# EAGLE board SO28 (EAGLE 6.4)
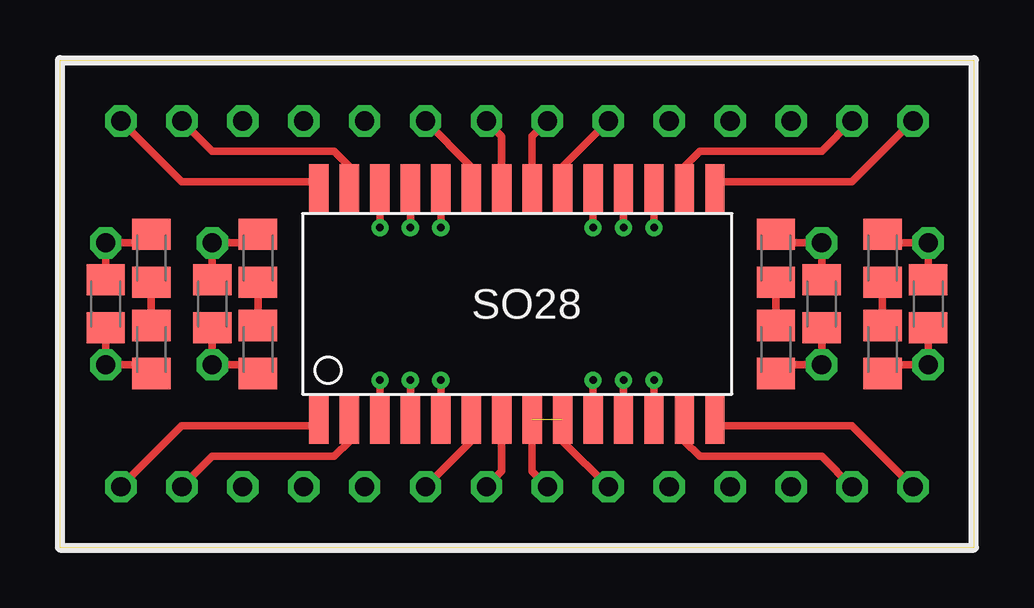
[diagram p0: board, top side]
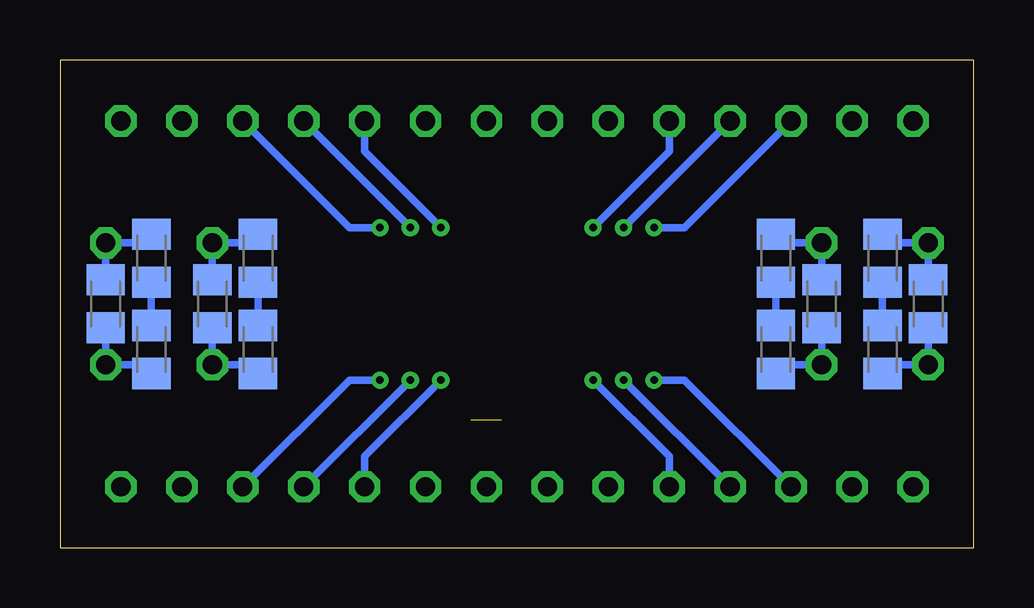
[diagram p1: board, bottom side, seen from below]

Size 38.1 x 20.32 mm. Coordinates in mm from the lower left corner, seen from the top.
Outline: 38.1,20.32 38.1,0 0,0 0,20.32 38.1,20.32
Copper layers (1*16): Top 0.035mm / dielectric 1.5mm / Bottom 0.035mm
Design rules "default": minimum track width 10mil, minimum drill 0.6mm, track to track 8mil, track to pad 8mil, pad to pad 8mil, via to via 8mil, smd to smd 8mil, copper to edge 40mil, drill to drill 8mil, minimum pad ring 10mil, minimum via ring 8mil, stop-mask expansion 4mil, vias tented up to drill 0mil, thermal gap 10mil
Net classes: 1 pwr: width 0.254 mm

## Footprints (pad centres in the part's own frame; a part is rotated, then mirrored left to right if it is on the bottom)
1 = drill 0.8 octagon: P$1 0,0
SO-28L = smd 0.8 x 2: 1 -8.255,-4.826; 2 -6.985,-4.826; 3 -5.715,-4.826; 4 -4.445,-4.826; 5 -3.175,-4.826; 6 -1.905,-4.826; 7 -0.635,-4.826; 8 0.635,-4.826; 9 1.905,-4.826; 10 3.175,-4.826; 11 4.445,-4.826; 12 5.715,-4.826; 13 6.985,-4.826; 14 8.255,-4.826; 15 8.255,4.826; 16 6.985,4.826; 17 5.715,4.826; 18 4.445,4.826; 19 3.175,4.826; 20 1.905,4.826; 21 0.635,4.826; 22 -0.635,4.826; 23 -1.905,4.826; 24 -3.175,4.826; 25 -4.445,4.826; 26 -5.715,4.826; 27 -6.985,4.826; 28 -8.255,4.826
C0805K = smd 1.3 x 1.6: 1 -1,0; 2 1,0

## Placement (x,y rotation side)
E$55  [1]  17.78,2.54 90 top
E$56  [1]  15.24,2.54 90 top
E$57  [1]  12.7,2.54 90 top
E$64  [SO-28L]  19.05,10.16 0 top
E$94  [1]  10.16,2.54 90 top
E$96  [1]  7.62,2.54 90 top
E$97  [1]  5.08,2.54 90 top
E$98  [1]  2.54,2.54 90 top
E$99  [C0805K]  6.35,10.16 90 top
E$100  [1]  6.35,12.7 0 top
E$101  [1]  6.35,7.62 0 top
E$102  [C0805K]  8.26,12.06 90 top
E$103  [1]  35.56,2.54 90 top
E$104  [1]  33.02,2.54 90 top
E$105  [1]  30.48,2.54 90 top
E$106  [1]  27.94,2.54 90 top
E$107  [1]  25.4,2.54 90 top
E$108  [1]  22.86,2.54 90 top
E$109  [1]  20.32,2.54 90 top
E$110  [1]  17.78,17.78 90 top
E$111  [1]  15.24,17.78 90 top
E$112  [1]  12.7,17.78 90 top
E$113  [1]  10.16,17.78 90 top
E$114  [1]  7.62,17.78 90 top
E$115  [1]  5.08,17.78 90 top
E$116  [1]  2.54,17.78 90 top
E$117  [C0805K]  8.26,8.26 90 top
E$118  [C0805K]  8.26,12.06 90 bottom
E$119  [C0805K]  8.26,8.26 90 bottom
E$120  [C0805K]  6.35,10.16 90 bottom
E$121  [1]  35.56,17.78 90 top
E$122  [1]  33.02,17.78 90 top
E$123  [1]  30.48,17.78 90 top
E$124  [1]  27.94,17.78 90 top
E$125  [1]  25.4,17.78 90 top
E$126  [1]  22.86,17.78 90 top
E$127  [1]  20.32,17.78 90 top
E$136  [C0805K]  1.91,10.16 90 top
E$137  [1]  1.91,12.7 0 top
E$138  [1]  1.91,7.62 0 top
E$139  [C0805K]  3.81,12.06 90 top
E$140  [C0805K]  3.81,8.26 90 top
E$141  [C0805K]  3.81,12.06 90 bottom
E$142  [C0805K]  3.81,8.26 90 bottom
E$143  [C0805K]  1.91,10.16 90 bottom
E$144  [C0805K]  31.75,10.16 270 top
E$145  [1]  31.75,7.62 180 top
E$146  [1]  31.75,12.7 180 top
E$147  [C0805K]  29.84,8.26 270 top
E$148  [C0805K]  29.84,12.06 270 top
E$149  [C0805K]  29.84,8.26 270 bottom
E$150  [C0805K]  29.84,12.06 270 bottom
E$151  [C0805K]  31.75,10.16 270 bottom
E$152  [C0805K]  36.2,10.16 270 top
E$153  [1]  36.2,7.62 180 top
E$154  [1]  36.2,12.7 180 top
E$155  [C0805K]  34.29,8.26 270 top
E$156  [C0805K]  34.29,12.06 270 top
E$157  [C0805K]  34.29,8.26 270 bottom
E$158  [C0805K]  34.29,12.06 270 bottom
E$159  [C0805K]  36.2,10.16 270 bottom

## Library data of the parts
E$55-E$57 E$94 E$96-E$98 E$100 E$101 E$103-E$116 E$121-E$127 E$137 E$138 E$145 E$146 E$153 E$154 = drill
E$64 E$99 E$102 E$117-E$120 E$136 E$139-E$144 E$147-E$152 E$155-E$159 = ref-packages

## Nets
S$56 [pwr]: E$64.8 E$64.9 E$108.P$1 E$109.P$1
S$57 [pwr]: E$64.10 E$107.P$1
S$58 [pwr]: E$64.11 E$106.P$1
S$59 [pwr]: E$64.12 E$105.P$1
S$60 [pwr]: E$64.13 E$104.P$1
S$61 [pwr]: E$64.14 E$103.P$1
S$62 [pwr]: E$55.P$1 E$64.7
S$63 [pwr]: E$56.P$1 E$64.6
S$64 [pwr]: E$57.P$1 E$64.5
S$65 [pwr]: E$64.4 E$94.P$1
S$66 [pwr]: E$64.3 E$96.P$1
S$67 [pwr]: E$64.2 E$97.P$1
S$68 [pwr]: E$64.1 E$98.P$1
S$69 [pwr]: E$64.28 E$116.P$1
S$70 [pwr]: E$64.27 E$115.P$1
S$71 [pwr]: E$64.26 E$114.P$1
S$72 [pwr]: E$64.25 E$113.P$1
S$73 [pwr]: E$64.24 E$112.P$1
S$74 [pwr]: E$64.23 E$111.P$1
S$75 [pwr]: E$64.22 E$110.P$1
S$76 [pwr]: E$64.21 E$127.P$1
S$77 [pwr]: E$64.20 E$126.P$1
S$78 [pwr]: E$64.19 E$125.P$1
S$79 [pwr]: E$64.18 E$124.P$1
S$80 [pwr]: E$64.17 E$123.P$1
S$81 [pwr]: E$64.16 E$122.P$1
S$82 [pwr]: E$64.15 E$121.P$1
S$88: E$99.1 E$101.P$1 E$117.1 E$119.1 E$120.1
S$89: E$102.1 E$117.2
S$90: E$99.2 E$100.P$1 E$102.2 E$118.2 E$120.2
S$91: E$118.1 E$119.2
S$92: E$136.1 E$138.P$1 E$140.1 E$142.1 E$143.1
S$93: E$139.1 E$140.2
S$94: E$136.2 E$137.P$1 E$139.2 E$141.2 E$143.2
S$95: E$141.1 E$142.2
S$96: E$144.1 E$146.P$1 E$148.1 E$150.1 E$151.1
S$97: E$147.1 E$148.2
S$98: E$144.2 E$145.P$1 E$147.2 E$149.2 E$151.2
S$99: E$149.1 E$150.2
S$100: E$152.1 E$154.P$1 E$156.1 E$158.1 E$159.1
S$101: E$155.1 E$156.2
S$102: E$152.2 E$153.P$1 E$155.2 E$157.2 E$159.2
S$103: E$157.1 E$158.2

## Tracks (layer width: path | path; a pad name or v marks a point on that pad's centre or on a via)
S$56  (1 unrouted)
  Top 0.305: E$64.8 19.68,3.17 E$109.P$1 | E$64.9 20.95,4.45 E$108.P$1
S$57  (via drill 0.3)
  Top 0.305: E$64.10 v22.23,6.99
  Bottom 0.305: v22.23,6.99 25.4,3.81 E$107.P$1
S$58  (via drill 0.3)
  Top 0.305: E$64.11 v23.5,6.99
  Bottom 0.305: v23.5,6.99 E$106.P$1
S$59  (via drill 0.3)
  Top 0.305: E$64.12 v24.77,6.99
  Bottom 0.305: v24.77,6.99 26.04,6.99 E$105.P$1
S$60
  Top 0.305: E$104.P$1 31.75,3.81 26.67,3.81 26.04,4.45 E$64.13
S$61
  Top 0.305: E$103.P$1 33.02,5.08 27.56,5.08 E$64.14
S$62
  Top 0.305: E$55.P$1 18.41,3.17 E$64.7
S$63
  Top 0.305: E$64.6 17.14,4.45 E$56.P$1
S$64  (via drill 0.3)
  Top 0.305: E$64.5 v15.88,6.99
  Bottom 0.305: v15.88,6.99 12.7,3.81 E$57.P$1
S$65  (via drill 0.3)
  Top 0.305: E$64.4 v14.61,6.99
  Bottom 0.305: v14.61,6.99 E$94.P$1
S$66  (via drill 0.3)
  Top 0.305: E$64.3 v13.34,6.99
  Bottom 0.305: v13.34,6.99 12.06,6.99 E$96.P$1
S$67
  Top 0.305: E$97.P$1 6.35,3.81 11.43,3.81 12.06,4.45 E$64.2
S$68
  Top 0.305: E$98.P$1 5.08,5.08 10.54,5.08 E$64.1
S$69
  Top 0.305: E$116.P$1 5.08,15.24 10.54,15.24 E$64.28
S$70
  Top 0.305: E$115.P$1 6.35,16.51 11.43,16.51 12.06,15.88 E$64.27
S$71  (via drill 0.3)
  Top 0.305: E$64.26 v13.34,13.34
  Bottom 0.305: v13.34,13.34 12.06,13.34 E$114.P$1
S$72  (via drill 0.3)
  Top 0.305: E$64.25 v14.61,13.34
  Bottom 0.305: v14.61,13.34 E$113.P$1
S$73  (via drill 0.3)
  Top 0.305: E$64.24 v15.88,13.34
  Bottom 0.305: v15.88,13.34 12.7,16.51 E$112.P$1
S$74
  Top 0.305: E$64.23 17.14,15.88 E$111.P$1
S$75
  Top 0.305: E$64.22 18.41,17.14 E$110.P$1
S$76
  Top 0.305: E$64.21 19.68,17.14 E$127.P$1
S$77
  Top 0.305: E$64.20 20.95,15.88 E$126.P$1
S$78  (via drill 0.3)
  Top 0.305: E$64.19 v22.23,13.34
  Bottom 0.305: v22.23,13.34 25.4,16.51 E$125.P$1
S$79  (via drill 0.3)
  Top 0.305: E$64.18 v23.5,13.34
  Bottom 0.305: v23.5,13.34 E$124.P$1
S$80  (via drill 0.3)
  Top 0.305: E$64.17 v24.77,13.34
  Bottom 0.305: v24.77,13.34 26.04,13.34 E$123.P$1
S$81
  Top 0.305: E$122.P$1 31.75,16.51 26.67,16.51 26.04,15.88 E$64.16
S$82
  Top 0.305: E$121.P$1 33.02,15.24 27.56,15.24 E$64.15
S$88
  Top 0.305: E$120.1 E$101.P$1 7.89,7.62 E$119.1
  Bottom 0.305: E$120.1 E$101.P$1 | E$101.P$1 7.89,7.62 E$119.1 8.53,7.25 8.89,7.62 E$101.P$1
S$89
  Top 0.305: E$117.2 E$102.1
S$90
  Top 0.305: E$102.2 8.26,12.7 E$100.P$1 E$99.2
  Bottom 0.305: E$99.2 E$100.P$1 7.89,12.7 E$102.2
S$91
  Bottom 0.305: E$119.2 E$118.1
S$92
  Top 0.305: E$143.1 E$138.P$1 3.44,7.62 E$142.1
  Bottom 0.305: E$143.1 E$138.P$1 | E$138.P$1 3.44,7.62 E$142.1 4.08,7.25 4.45,7.62 E$138.P$1
S$93
  Top 0.305: E$140.2 E$139.1
S$94
  Top 0.305: E$139.2 3.81,12.7 E$137.P$1 E$136.2
  Bottom 0.305: E$136.2 E$137.P$1 3.44,12.7 E$139.2
S$95
  Bottom 0.305: E$142.2 E$141.1
S$96
  Top 0.305: E$151.1 E$146.P$1 30.21,12.7 E$150.1
  Bottom 0.305: E$151.1 E$146.P$1 | E$146.P$1 30.21,12.7 E$150.1 29.57,13.06 29.21,12.7 E$146.P$1
S$97
  Top 0.305: E$148.2 E$147.1
S$98
  Top 0.305: E$147.2 29.84,7.62 E$145.P$1 E$144.2
  Bottom 0.305: E$144.2 E$145.P$1 30.21,7.62 E$147.2
S$99
  Bottom 0.305: E$150.2 E$149.1
S$100
  Top 0.305: E$159.1 E$154.P$1 34.66,12.7 E$158.1
  Bottom 0.305: E$159.1 E$154.P$1 | E$154.P$1 34.66,12.7 E$158.1 34.02,13.06 33.66,12.7 E$154.P$1
S$101
  Top 0.305: E$156.2 E$155.1
S$102
  Top 0.305: E$155.2 34.29,7.62 E$153.P$1 E$152.2
  Bottom 0.305: E$152.2 E$153.P$1 34.66,7.62 E$155.2
S$103
  Bottom 0.305: E$158.2 E$157.1

## Text on the board
tPlace: SO28